# Altium PCB MatrixPCB.PcbDoc
Units mm, origin at the board's own origin, x right, y up, seen from the top; angles counter-clockwise.
Board outline 93.6 x 98.58 mm, 2 copper layers (Top Layer, Bottom Layer); 45 components, 30 nets, 190 pads, 63 vias.
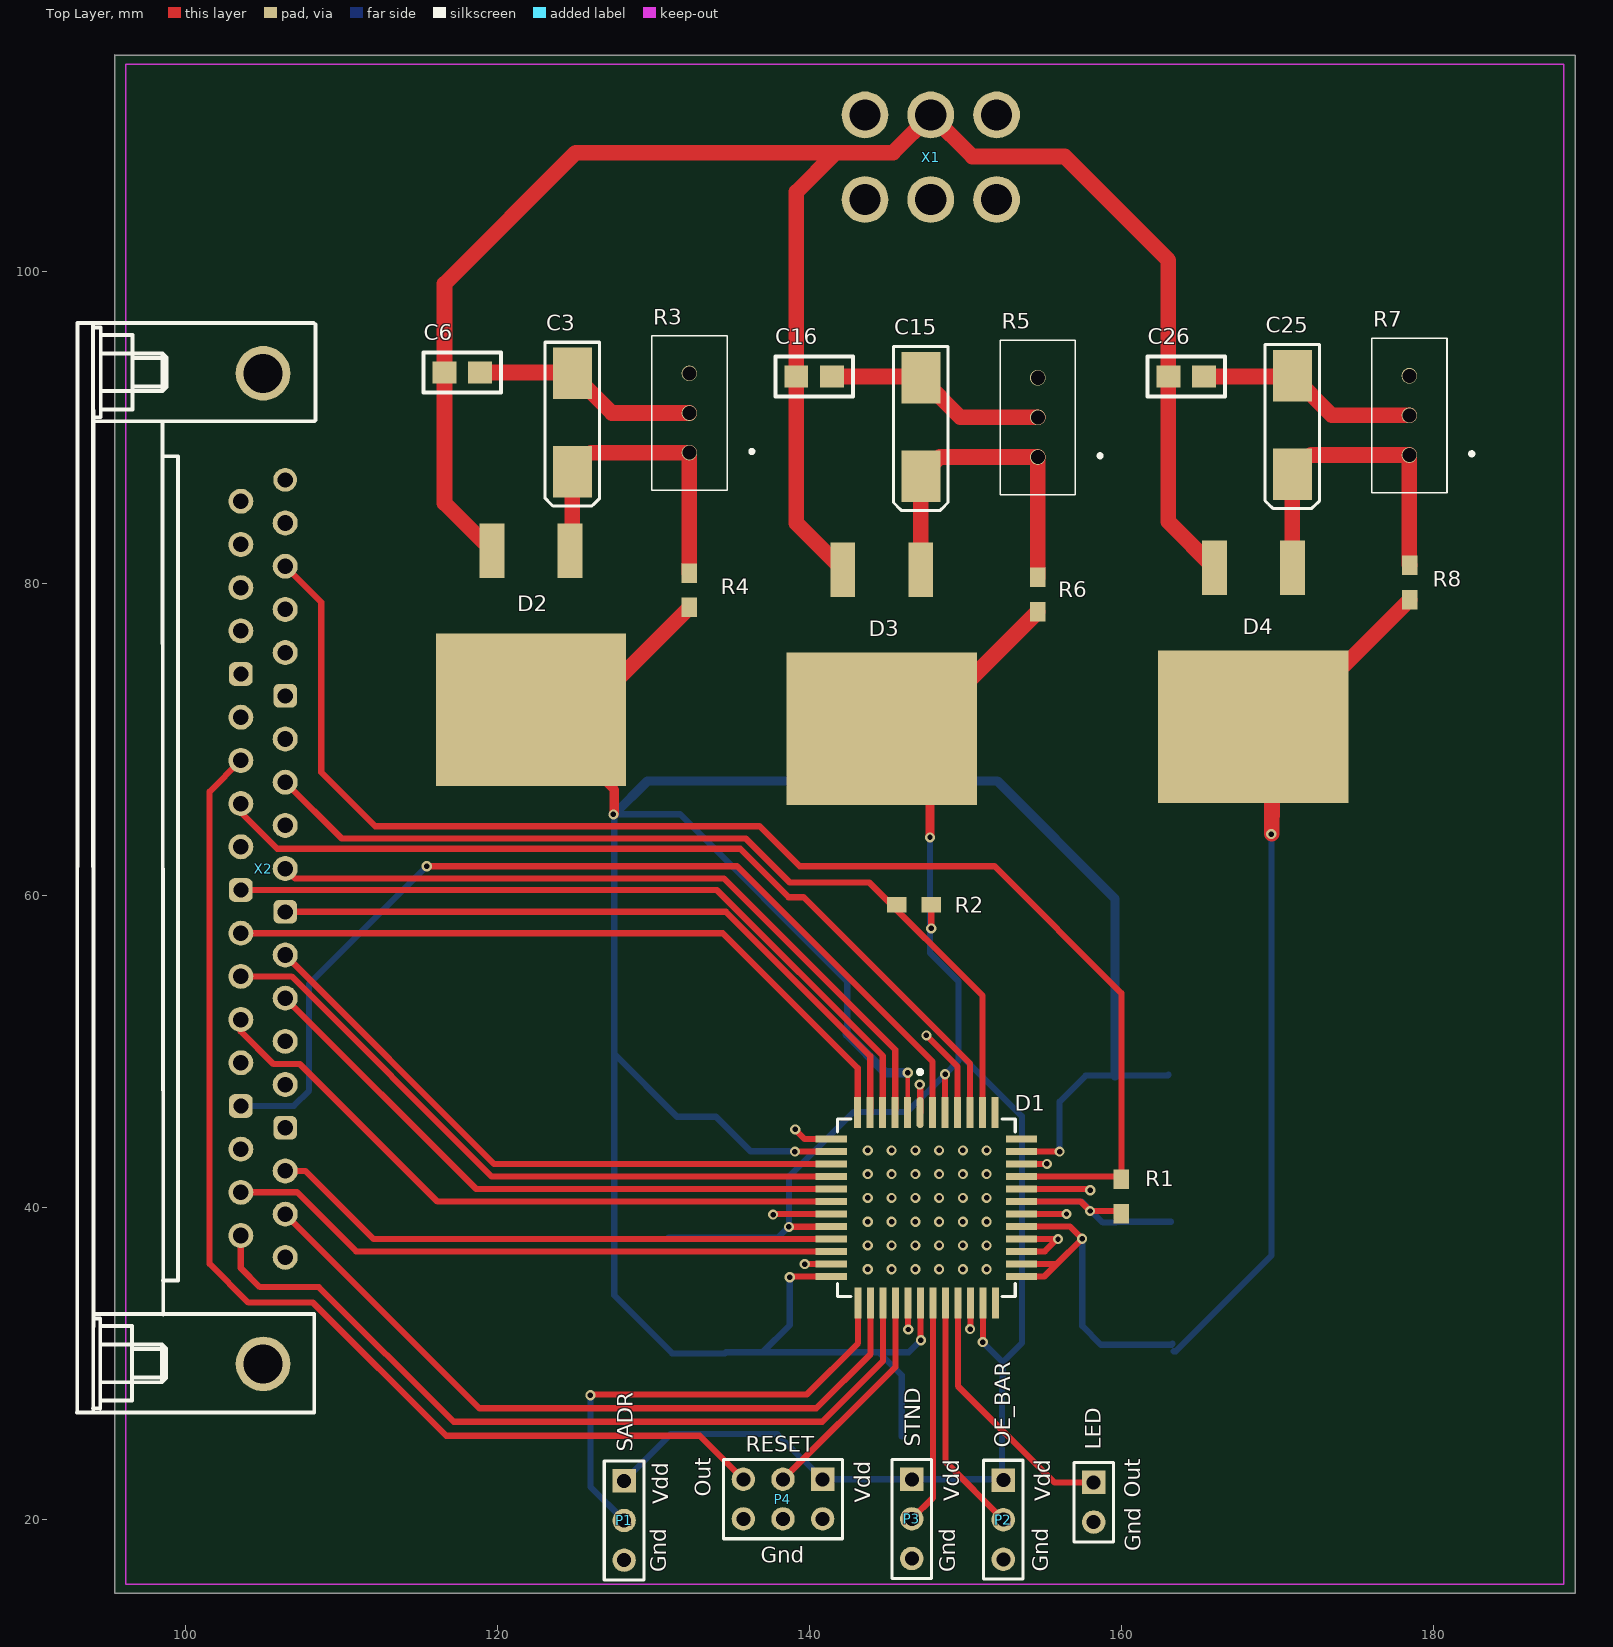
[diagram p0: Top Layer view]
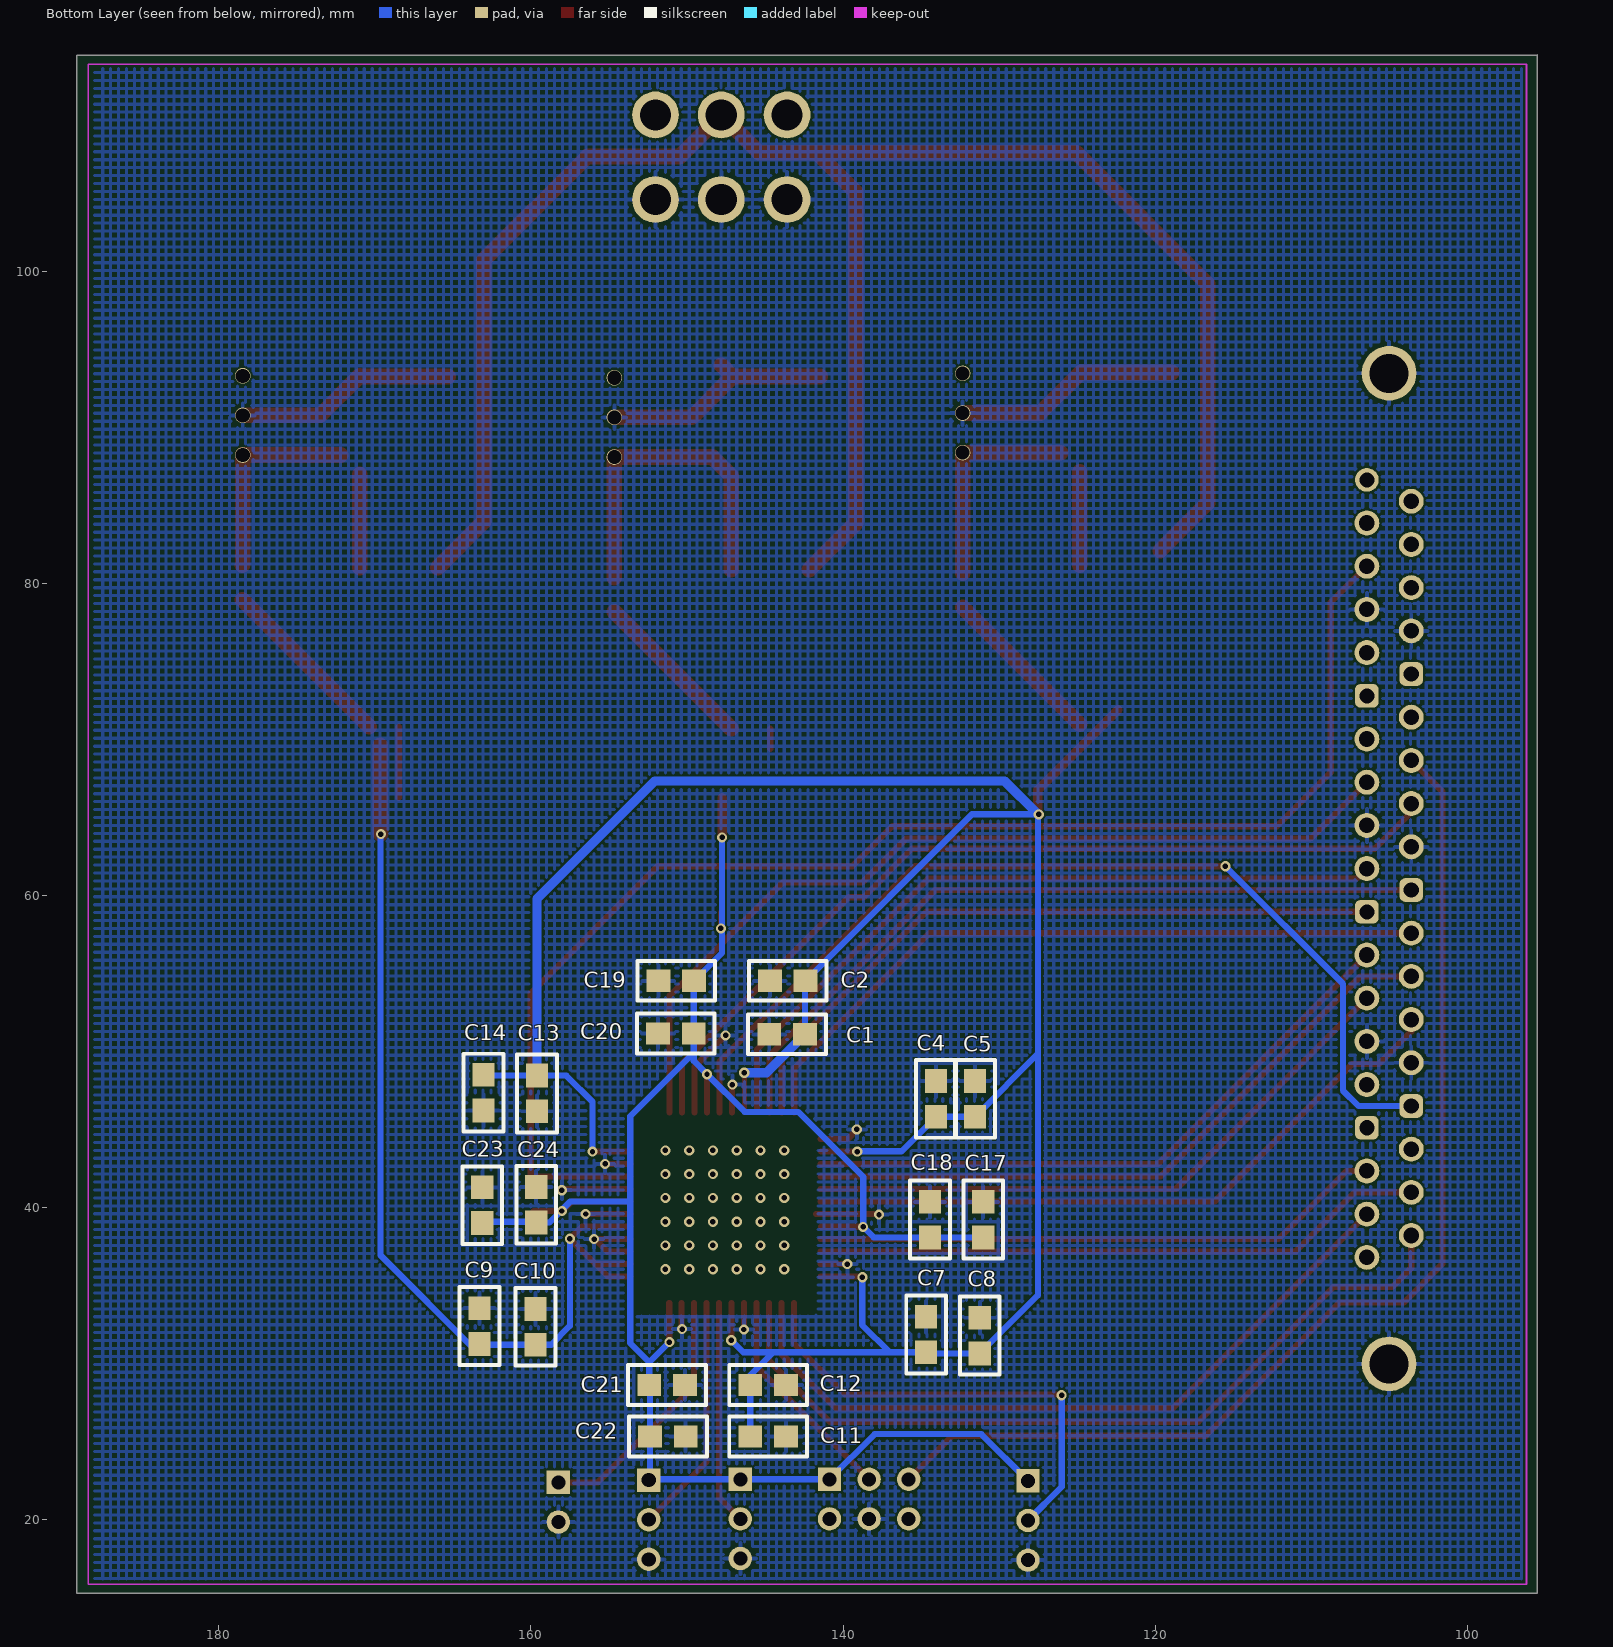
[diagram p1: Bottom Layer view, seen from below]

## Layer stack, top to bottom
Top Solder: solder mask 0.0102, Solder Resist, Dk 3.5
Top Layer: signal copper 0.0356
Dielectric 1: dielectric 0.32, FR-4, Dk 4.8
Bottom Layer: signal copper 0.0356
Bottom Solder: solder mask 0.0102, Solder Resist, Dk 3.5

## Board outline
95.5,15.316 95.5,113.9 95.506,113.894 95.509,113.891 189.1,113.891 189.1,15.316 95.5,15.316

## Design rules (kind name [scope] priority, off if disabled: settings)
Clearance [All] p1: gap=0.13
HoleSize [All] p1: absolutevalues=TRUE maxlimit=2.54 minlimit=0.2 maxpercent=80.000 minpercent=20.000
PolygonConnect [All] p1: connectstyle=Relief reliefconductorwidth=0.254 reliefentries=4 polygonreliefangle="90 Angle" airgapwidth=0.254
RoutingVias [All] p1: holewidth=0.711 width=1.27 viastyle="Through Hole" minholewidth=0.711 minwidth=1.27 maxholewidth=0.711 maxwidth=1.27
SolderMaskExpansion [All] p1: expansion=0.102
Width [All] p1: maxlimit=2.54 minlimit=0.125 preferedwidth=0.254
28 further rules are at their usual default settings.

## Components (designator, comment, footprint, x,y, rotation, side; value= is the part's Value field where it differs from the comment)
C1 "1,0" CAP_SMALL 146.092,49.86 r180 bottom
C2 "0,1" CAP_SMALL 146.05,53.289 r180 bottom
C3 "10,0" TYPE_C 124.829,93.491 r270 top
C4 "1,0" CAP_SMALL 135.306,49.497 r270 bottom
C5 "0,1" CAP_SMALL 132.806,49.497 r270 bottom
C6 "0,1" CAP_SMALL 115.265,92.278 r0 top
C7 "1,0" CAP_SMALL 135.941,34.392 r270 bottom
C8 "0,1" CAP_SMALL 132.5,34.324 r270 bottom
C9 "0,1" CAP_SMALL 162.027,29.921 r90 bottom
C10 "1,0" CAP_SMALL 158.445,29.87 r90 bottom
C11 "1,0" CAP_SMALL 142.291,26.619 r0 bottom
C12 "0,1" CAP_SMALL 142.291,29.921 r0 bottom
C13 "1,0" CAP_SMALL 158.344,44.831 r90 bottom
C14 "0,1" CAP_SMALL 161.773,44.882 r90 bottom
C15 "10,0" TYPE_C 147.16,93.211 r270 top
C16 "0,1" CAP_SMALL 137.82,92.024 r0 top
C17 "1,0" CAP_SMALL 132.283,41.758 r270 bottom
C18 "0,1" CAP_SMALL 135.687,41.758 r270 bottom
C19 "0,1" CAP_SMALL 148.184,55.829 r0 bottom
C20 "1,0" CAP_SMALL 148.209,52.451 r0 bottom
C21 "1,0" CAP_SMALL 148.768,29.921 r0 bottom
C22 "0,1" CAP_SMALL 148.717,26.619 r0 bottom
C23 "0,1" CAP_SMALL 161.849,37.668 r90 bottom
C24 "1,0" CAP_SMALL 158.394,37.694 r90 bottom
C25 "10,0" TYPE_C 170.976,93.338 r270 top
C26 "0,1" CAP_SMALL 161.671,92.024 r0 top
D1 "MT9M131" LCC48 147.5,40 r0 top
D2 "LM317" D2PACK 122.174,71.933 r180 top
D3 "LM317" D2PACK 144.66,70.711 r180 top
D4 "LM317" D2PACK 168.476,70.838 r180 top
LED "Header 2" HDR1X2 158.242,22.403 r270 top (schematic designator P5)
P1 "Header 3" HDR1X3 128.143,22.504 r270 top
P2 "Header 3" HDR1X3 152.451,22.555 r270 top
P3 "Header 3" HDR1X3 146.583,22.606 r270 top
P4 "Header 3X2" HDR2X3 140.868,22.606 r180 top
R1 "1,5k" 0805 160.02,39.624 r90 top
R2 "1,5k" 0805 147.828,59.436 r180 top
R3 "1k" PV36W 132.329,93.491 r0 top
R4 "240" 0805 132.329,78.491 r90 top
R5 "1k" PV36W 154.66,93.211 r0 top
R6 "240" 0805 154.66,78.211 r90 top
R7 "1k" PV36W 178.476,93.338 r0 top
R8 "240" 0805 178.511,78.994 r90 top
X1 "POWER" POWER 147.803,102.438 r0 top
X2 "D-SUB_FEMALE" CHEAP_CONN_FEMALE 105,30 r90 top

## Footprints (in the part's own frame and the unit in brackets; to place one, negate y for a bottom-side part, rotate by r counter-clockwise, add the part's x,y. Pads: shape width x height; smd on the part's side, far side on the other; paste and mask are expansions set on the pad)
0805 [mm]
  rect 1.25x1 smd: 1(0,0) 2(2.2,0)
CAP_SMALL [mil] "FROM_MAX"
  rect 60x55.98 smd: 1(53.71,50) 2(143.71,50)
  silkscreen extent 1,0 197,100, body extent 20,18 178,82, height 100
CHEAP_CONN_FEMALE [mm] "CHEAP_CONN_FEMALE"
  round 1.6 hole 1: 1(6.833,-1.422) 2(9.601,-1.422) 3(12.37,-1.422) 5(17.907,-1.422) 6(20.676,-1.422) 7(23.444,-1.422) 8(26.213,-1.422) 10(31.75,-1.422) 11(34.519,-1.422) 12(37.287,-1.422) 13(40.056,-1.422) 15(45.593,-1.422) 16(48.362,-1.422) 17(51.13,-1.422) 18(53.899,-1.422) 20(8.23,1.422) 21(10.998,1.422) 22(13.767,1.422) 24(19.304,1.422) 25(22.073,1.422) 26(24.841,1.422) 27(27.61,1.422) 29(33.147,1.422) 30(35.916,1.422) 31(38.684,1.422) 32(41.453,1.422) 34(46.99,1.422) 35(49.759,1.422) 36(52.527,1.422) 37(55.296,1.422)
  rrect50% 1.524x1.524 hole 0.965: 4(15.138,-1.422) 9(28.981,-1.422) 14(42.824,-1.422) 23(16.535,1.422) 28(30.378,1.422) 33(44.221,1.422)
  round 1.524 hole 0.965: 19(56.667,-1.422)
  round 3.5 hole 2.5: 38(0,0) 39(63.5,0)
  silkscreen extent -3.11,-3.36 66.72,11.92
D2PACK [mm]
  rect 12.2x9.8 smd: 1(0,0)
  rect 1.6x3.5 smd: 2(-2.5,-10.2) 3(2.5,-10.2)
HDR1X2 [mm] "Connector; Header; 2 Position"
  rect 1.5x1.5 hole 0.9: 1(0,0)
  round 1.5 hole 0.9: 2(2.54,0)
  silkscreen extent -1.27,-1.27 3.81,1.27
HDR1X3 [mm] "Connector; Header; 3 Position"
  rect 1.5x1.5 hole 0.9: 1(0,0)
  round 1.5 hole 0.9: 2(2.54,0) 3(5.08,0)
  silkscreen extent -1.27,-1.27 6.35,1.27
HDR2X3 [mm] "Connector; Header; 3x2 Position"
  rect 1.5x1.5 hole 0.9: 1(0,0)
  round 1.5 hole 0.9: 2(0,2.54) 3(2.54,0) 4(2.54,2.54) 5(5.08,0) 6(5.08,2.54)
  silkscreen extent -1.27,-1.27 6.35,3.81
LCC48 [mm]
  oval 0.45x2 smd: 1(-0.381,6.111)
  rect 0.45x2 smd: 2(-1.181,6.111) 3(-1.981,6.111) 4(-2.781,6.111) 5(-3.581,6.111) 6(-4.381,6.111) 19(-4.356,-6.089) 20(-3.556,-6.089) 21(-2.756,-6.089) 22(-1.956,-6.089) 23(-1.156,-6.089) 24(-0.356,-6.089) 25(0.444,-6.089) 26(1.244,-6.089) 27(2.044,-6.089) 28(2.844,-6.089) 29(3.644,-6.089) 30(4.444,-6.089) 43(4.419,6.111) 44(3.619,6.111) 45(2.819,6.111) 46(2.019,6.111) 47(1.219,6.111) 48(0.419,6.111)
  rect 2x0.45 smd: 7(-6.081,4.411) 8(-6.081,3.611) 9(-6.081,2.811) 10(-6.081,2.011) 11(-6.081,1.211) 12(-6.081,0.411) 13(-6.081,-0.389) 14(-6.081,-1.189) 15(-6.081,-1.989) 16(-6.081,-2.789) 17(-6.081,-3.589) 18(-6.081,-4.389) 31(6.119,-4.389) 32(6.119,-3.589) 33(6.119,-2.789) 34(6.119,-1.989) 35(6.119,-1.189) 36(6.119,-0.389) 37(6.119,0.411) 38(6.119,1.211) 39(6.119,2.011) 40(6.119,2.811) 41(6.119,3.611) 42(6.119,4.411)
  silkscreen extent -5.68,-5.69 5.72,8.84
POWER [mm] "POWER"
  round 3 hole 2: 1(4.217,7.62) 2(0,7.62) 3(-4.217,7.62) 4(4.217,2.198) 5(0,2.198) 6(-4.217,2.198)
PV36W [mm]
  round 1 hole 0.9: 1(0,-5.08) 2(0,-2.54) 3(0,0)
  silkscreen extent -2.41,-7.49 4.1,2.41
TYPE_C [mm]
  rect 3.3x2.5 smd: 1(0,0) 2(6.3,0)
  silkscreen extent -2,-1.75 8.5,1.75

## Part data
C1 C2 C4 C5 C6 C7 C8 C9 C10 C11 C12 C13 C14 C16 C17 C18 C19 C20 C21 C22 C23 C24 C26: library part CAP_SMALL, "0805"
C3 C15 C25: library part CAP_TANT, "SMD"
D1: "Matrix"
LED: "Header, 2-Pin"
P1 P2 P3: "Header, 3-Pin"
P4: "Header, 3-Pin, Dual row"
R1 R2 R4 R6 R8: library part RES0805, "0805"
R3 R5 R7: library part RES_VAR, "PV36W102C (СП5-2ВБ) 1 кОм"
X2: library part CHEAP_CON_37_FEMALE

## Via types
v1: diameter 0.65, hole 0.35, Top Layer to Bottom Layer, 63 vias

## Nets (pads, with @x,y where several pads share a name; then routed paths per layer and width w, separated by ;. In a path a pad name is that pad's centre, name@x,y a point inside that pad or via, vN(x,y) a via of type N, cw(c..) or ccw(c..) an arc to the next point about the centre after c; other vN are vias at no path point)
DOUT0: D1.3 X2.10 | length 47.7
  Top Layer w0.4: X2.10 107.06,61.112 134.55,61.112 145.517,50.145 D1.3@145.517,46.304
DOUT1: D1.4 X2.28 | length 49.2
  Top Layer w0.4: X2.28 134.084,60.378 144.719,49.743 D1.4
DOUT2: D1.5 X2.9 | length 44.9
  Top Layer w0.4: X2.9 134.668,58.981 143.919,49.731 D1.5
DOUT3: D1.6 X2.27 | length 46
  Top Layer w0.4: X2.27 134.47,57.61 143.119,48.961 D1.6
DOUT4: D1.9 X2.8 | length 40.5
  Top Layer w0.4: X2.8 119.824,42.811 D1.9
DOUT5: D1.10 X2.26 | length 43.2
  Top Layer w0.4: X2.26 106.83,54.841 119.66,42.011 D1.10
DOUT6: D1.11 X2.7 | length 40.1
  Top Layer w0.4: X2.7 118.656,41.211 D1.11
DOUT7: D1.12 X2.25 | length 43.1
  Top Layer w0.4: X2.25 103.578,51.312 105.664,49.225 107.366,49.225 116.18,40.411 D1.12
DOUT_LSB0: D1.15 X2.3 | length 36.8
  Top Layer w0.4: X2.3 107.719,42.37 112.078,38.011 D1.15
DOUT_LSB1: D1.16 X2.21 | length 39.4
  Top Layer w0.4: X2.21 107.185,40.998 110.973,37.211 D1.16
EXTCLK: D1.45 X2.30 | length 57.1
  Top Layer w0.4: X2.30 103.578,65.358 105.918,63.017 135.585,63.017 138.684,59.919 139.649,59.919 150.319,49.249 D1.45
FV: D1.21 X2.20 | length 52.7
  Top Layer w0.4: X2.20 103.578,36.148 104.8,34.925 108.585,34.925 117.221,26.289 140.843,26.289 144.744,30.19 D1.21
GND: C1.1 C2.1 C3.1 C4.1 C5.1 C6.2 C7.1 C8.1 C9.2 C10.2 C11.1 C12.1 C13.1 C14.1 C15.1 C16.2 C17.1 C18.1 C19.2 C20.2 C21.1 C22.1 C23.2 C24.2 C25.1 C26.2 D1.1 D1.7 D1.13 D1.17 D1.23 D1.28 D1.33 D1.34 D1.36 D1.38 D1.40 D1.46 LED.2 P1.3 P2.3 P3.3 P4.4 R3.2 R5.2 R7.2 X1.4 X1.5 X1.6 X2.6 X2.11 X2.16 X2.24 X2.29 X2.34 X2.38 X2.39 | length 76.9
  Top Layer w0.4: v1(137.693,39.573) 137.731,39.611 D1.13 D1.13@141.724,39.611 ; v1@139.116,45.009 139.714,44.411 D1.7 ; v1@139.713,36.411 D1.17 ; v1@146.344,32.193 D1.23 ; D1.1 v1@147.119,47.904 ; v1(147.523,51.054) 149.519,49.058 D1.46 ; v1@150.344,32.183 D1.28 ; D1.33 155.118,37.211 155.918,38.011 D1.34 ; D1.36 v1(156.502,39.611) ; D1.38 v1@158.026,41.211 ; D1.40 v1@155.131,42.811
  Top Layer w1: C6.2 124.771,93.548 C3.1 127.369,90.951 R3.2 ; C16.2 147.077,93.294 C15.1@147.803,94.02 ; C15.1 149.7,90.671 R5.2 ; C26.2 170.932,93.294 C25.1 173.516,90.798 R7.2
  other v1: 146.355,32.207 150.317,32.233 139.725,36.398 155.956,37.998 158.026,41.135 155.245,42.824 139.116,45.034 147.091,47.904
LV: D1.20 X2.2 | length 47.4
  Top Layer w0.4: X2.2 118.871,27.153 140.462,27.153 143.944,30.635 D1.20
NetC3_2: C3.2 D2.2 R3.1 R4.2 | length 20
  Top Layer w1: D2.2@124.829,81.191 C3.2 ; C3.2@126.049,88.411 R3.1 R4.2
NetC15_2: C15.2 D3.2 R5.1 R6.2 | length 21.7
  Top Layer w1: D3.2 C15.2 148.38,88.131 R5.1 R6.2
NetC25_2: C25.2 D4.2 R7.1 R8.2 | length 19.4
  Top Layer w1: D4.2 C25.2 ; C25.2@172.196,88.258 R7.1 178.476,81.229 R8.2
NetD1_19: D1.19 P1.2 | length 30
  Top Layer w0.4: v1@125.959,28.042 139.852,28.042 143.144,31.333 D1.19
  Bottom Layer w0.4: v1(125.984,27.991) 125.984,22.124 P1.2
NetD1_25: D1.25 P3.2 | length 14.4
  Top Layer w0.4: P3.2 147.944,21.427 D1.25
NetD1_26: D1.26 P2.2 | length 15.4
  Top Layer w0.4: D1.26 148.744,23.722 P2.2
NetD1_27: D1.27 LED.1 | length 16.6
  Top Layer w0.4: D1.27 149.544,28.586 155.727,22.403 LED.1
PIXCLK: D1.48 X2.23 | length 63.2
  Top Layer w0.4: v1(115.494,61.9) 135.386,61.9 147.919,49.367 D1.48
  Bottom Layer w0.4: X2.23 106.962,46.535 107.95,47.523 107.95,54.356 v1(115.494,61.9)
RES_BAR: D1.22 P4.3 | length 14.3
  Top Layer w0.4: P4.3 145.544,29.822 D1.22
RES_BAR_OUT: P4.5 X2.31 | length 73
  Top Layer w0.4: X2.31 101.575,66.681 101.575,36.424 104.064,33.934 108.204,33.934 116.738,25.4 132.994,25.4 P4.5
SCLK: D1.44 R2.2 X2.12 | length 57.9
  Top Layer w0.4: X2.12 110.032,63.678 135.941,63.678 138.76,60.858 143.866,60.858 151.119,53.605 D1.44
SDATA: D1.39 R1.2 X2.17 | length 89.5
  Top Layer w0.4: X2.17 108.737,78.815 108.737,67.92 112.192,64.465 136.83,64.465 139.395,61.9 151.892,61.9 160.02,53.772 R1.2 ; D1.39 R1.2@159.833,42.011
VAA: C9.1 C10.1 D1.31 D1.32 D1.35 D4.1 R8.1 | length 80.8
  Top Layer w0.4: D1.31 155.093,35.611 155.893,36.411 ; D1.32 155.893,36.411 ; D1.35 156.718,38.811 v1(157.505,38.024) 155.893,36.411 ; D4.1@168.476,66.296 D4.1
  Top Layer w1: v1@169.647,63.983 169.647,65.126 ; 169.672,65.151 D4.1@169.672,69.642 ; D4.1@170.355,70.838 R8.1
  Bottom Layer w0.4: v1(157.505,38.024) 157.505,32.436 158.707,31.235 C10.1 163.246,31.235 C9.1 ; C9.1@163.373,30.81 163.5,30.81 169.647,36.957 v1@169.647,63.957
  other v1: 169.621,63.957
VCC: C6.1 C16.1 C26.1 D2.3 D3.3 D4.3 X1.2 | length 123
  Top Layer w1: D2.3 116.629,85.177 C6.1 116.629,99.23 125.044,107.645 141.707,107.645 ; D3.3 139.185,83.886 C16.1 139.185,105.123 141.707,107.645 ; D4.3 163.035,83.979 C26.1 163.035,100.744 156.388,107.391 150.47,107.391 X1.2 145.39,107.645 141.707,107.645
VDD: C1.2 C2.2 C4.2 C5.2 C7.2 C8.2 C11.2 C12.2 C13.2 C14.2 D1.2 D1.8 D1.18 D1.24 D1.41 D2.1 R4.1 | length 195.8
  Top Layer w0.305: D1.2 v1@146.319,48.666
  Top Layer w0.4: v1@138.735,35.611 D1.18 ; v1(139.09,43.612) D1.8@141.393,43.612 ; v1@147.144,31.443 D1.24 ; D1.41 v1(156.058,43.612)
  Top Layer w0.6: D2.1@122.377,71.933 127.508,66.802 v1@127.508,65.227
  Top Layer w1: D2.1@124.829,70.991 R4.1
  Bottom Layer w0.4: v1(138.76,35.56) 138.76,32.487 137.015,30.741 ; v1@138.938,43.637 136.246,43.637 C4.2 C5.2 127.508,49.875 ; C2.2 131.732,65.227 127.508,65.227 127.508,49.875 ; C1.2 C2.2@142.442,54.517 ; C11.2 C12.2 145.941,29.268 144.468,30.741 ; v1(147.168,31.521) 146.388,30.741 144.468,30.741 ; v1(156.058,43.612) 156.058,46.812 157.727,48.481 C13.2 162.992,48.481 C14.2 ; 127.508,49.875 127.508,34.395 C8.2 134.603,30.673 C7.2 137.015,30.741 ; 137.015,30.741 144.468,30.741
  Bottom Layer w0.6: v1(127.457,65.227) 127.508,65.227 129.642,67.361 152.07,67.361 159.614,59.817 C13.2 ; C1.2 144.906,48.666 v1(146.329,48.666)
VDDIO: C17.2 C18.2 C19.1 C20.1 C21.2 C22.2 C23.1 C24.1 D1.14 D1.29 D1.37 D1.47 D3.1 P1.1 P2.1 P3.1 P4.1 R1.1 R2.1 R6.1 | length 138
  Top Layer w0.4: v1(138.71,38.786) D1.14@141.394,38.786 ; D3.1@144.66,69.437 D3.1 ; v1(147.828,57.912) 147.828,58.928 ; D1.47 v1(148.719,48.567) ; v1@151.144,31.406 D1.29 ; D1.37 157.404,40.411 v1(158.013,39.802) R1.1@159.842,39.802
  Top Layer w0.6: v1(147.752,63.754) D3.1@147.752,66.294
  Top Layer w1: D3.1@147.16,70.711 R6.1
  Bottom Layer w0.4: P1.1 131.14,25.502 137.973,25.502 P4.1 P3.1 152.367,22.606 C22.2 C21.2@152.367,28.88 ; C17.2 C18.2@134.366,38.107 ; C18.2 138.031,38.107 v1(138.71,38.786) 138.71,41.986 142.875,46.151 146.304,46.151 v1(148.719,48.567) 149.573,49.421 149.573,49.944 ; v1(147.752,63.754) 147.752,56.355 C19.1 149.573,54.534 C20.1 149.573,49.944 ; v1(151.13,31.394) 152.418,30.106 ; C21.2 152.418,30.106 ; C24.1 158.834,39.058 157.48,40.411 153.67,40.411 153.645,40.437 ; C24.1@159.741,39.109 C23.1@163.205,39.109 ; 149.573,49.944 153.645,45.872 153.645,40.437 ; 152.418,30.106 153.645,31.333 153.645,40.437
pads on no net: D1.30 D1.42 D1.43 P4.2 P4.6 R3.3 R5.3 R7.3 X1.1 X1.3 X2.1 X2.4 X2.5 X2.13 X2.14 X2.15 X2.18 X2.19 X2.22 X2.32 X2.33 X2.35 X2.36 X2.37
copper on no net:
  other v1: 143.764,36.068 145.288,36.068 146.812,36.068 148.336,36.068 149.86,36.068 151.384,36.068 143.764,37.592 145.288,37.592 146.812,37.592 148.336,37.592 149.86,37.592 151.384,37.592 143.764,39.116 145.288,39.116 146.812,39.116 148.336,39.116 149.86,39.116 151.384,39.116 143.764,40.64 145.288,40.64 146.812,40.64 148.336,40.64 149.86,40.64 151.384,40.64 143.764,42.164 145.288,42.164 146.812,42.164 148.336,42.164 149.86,42.164 151.384,42.164 143.764,43.688 145.288,43.688 146.812,43.688 148.336,43.688 149.86,43.688 151.384,43.688

## Polygon pours and split planes (outlines as drawn)
GND on Bottom Layer "Top Layer-No Net" (hatched 90Degree grid 0.508 track 0.203, remove dead copper, pour order 16): 98.425,16.231 187.96,16.231 187.96,113.03 96.52,113.03 96.52,16.231

## Keep-outs
Keep-Out Layer:
  lines w0.1: 96.19,15.875 96.19,17.018 96.19,113.284 96.19,113.309 188.366,113.309 188.366,16.764 188.366,15.875 96.19,15.875

## Silkscreen, mask and mechanical layers (free items; w line width, h text height)
Top Overlay:
  text "STND" at 147.142,24.689 h1 r90
  text "OE_BAR" at 152.883,24.613 h1 r90
  text "SADR" at 128.702,24.384 h1 r90
  text "RESET" at 135.941,24.359 h1
  text "Out" at 161.239,21.412 h1 r90
  text "Vdd" at 155.448,21.209 h1 r90
  text "Vdd" at 149.631,21.184 h1 r90
  text "Vdd" at 130.962,21.006 h1 r90
  text "Gnd" at 161.265,18.009 h1 r90
  text "Gnd" at 136.906,17.247 h1
  text "Gnd" at 155.346,16.688 h1 r90
  text "Gnd" at 130.861,16.662 h1 r90
  text "Gnd" at 149.377,16.662 h1 r90
Mechanical 1:
  lines w0.1: 95.5,15.316 189.1,15.316 189.1,113.891 189.103,113.894 188.544,113.894 95.506,113.894 95.5,113.9 95.5,15.316

## Text inside footprints (layer, text, board x,y; h text height)
P4: Top Overlay "Vdd" at 143.916,21.107 h1 r90; Top Overlay "Out" at 133.706,21.488 h1 r90